# Altium PCB LYT Driver RL.PcbDoc
Units mil, origin at the board's own origin, x right, y up, seen from the top; angles counter-clockwise.
Board outline 2935 x 2834.35 mil, 2 copper layers (Top Layer, Bottom Layer); 34 components, 34 nets, 87 pads, 0 vias.
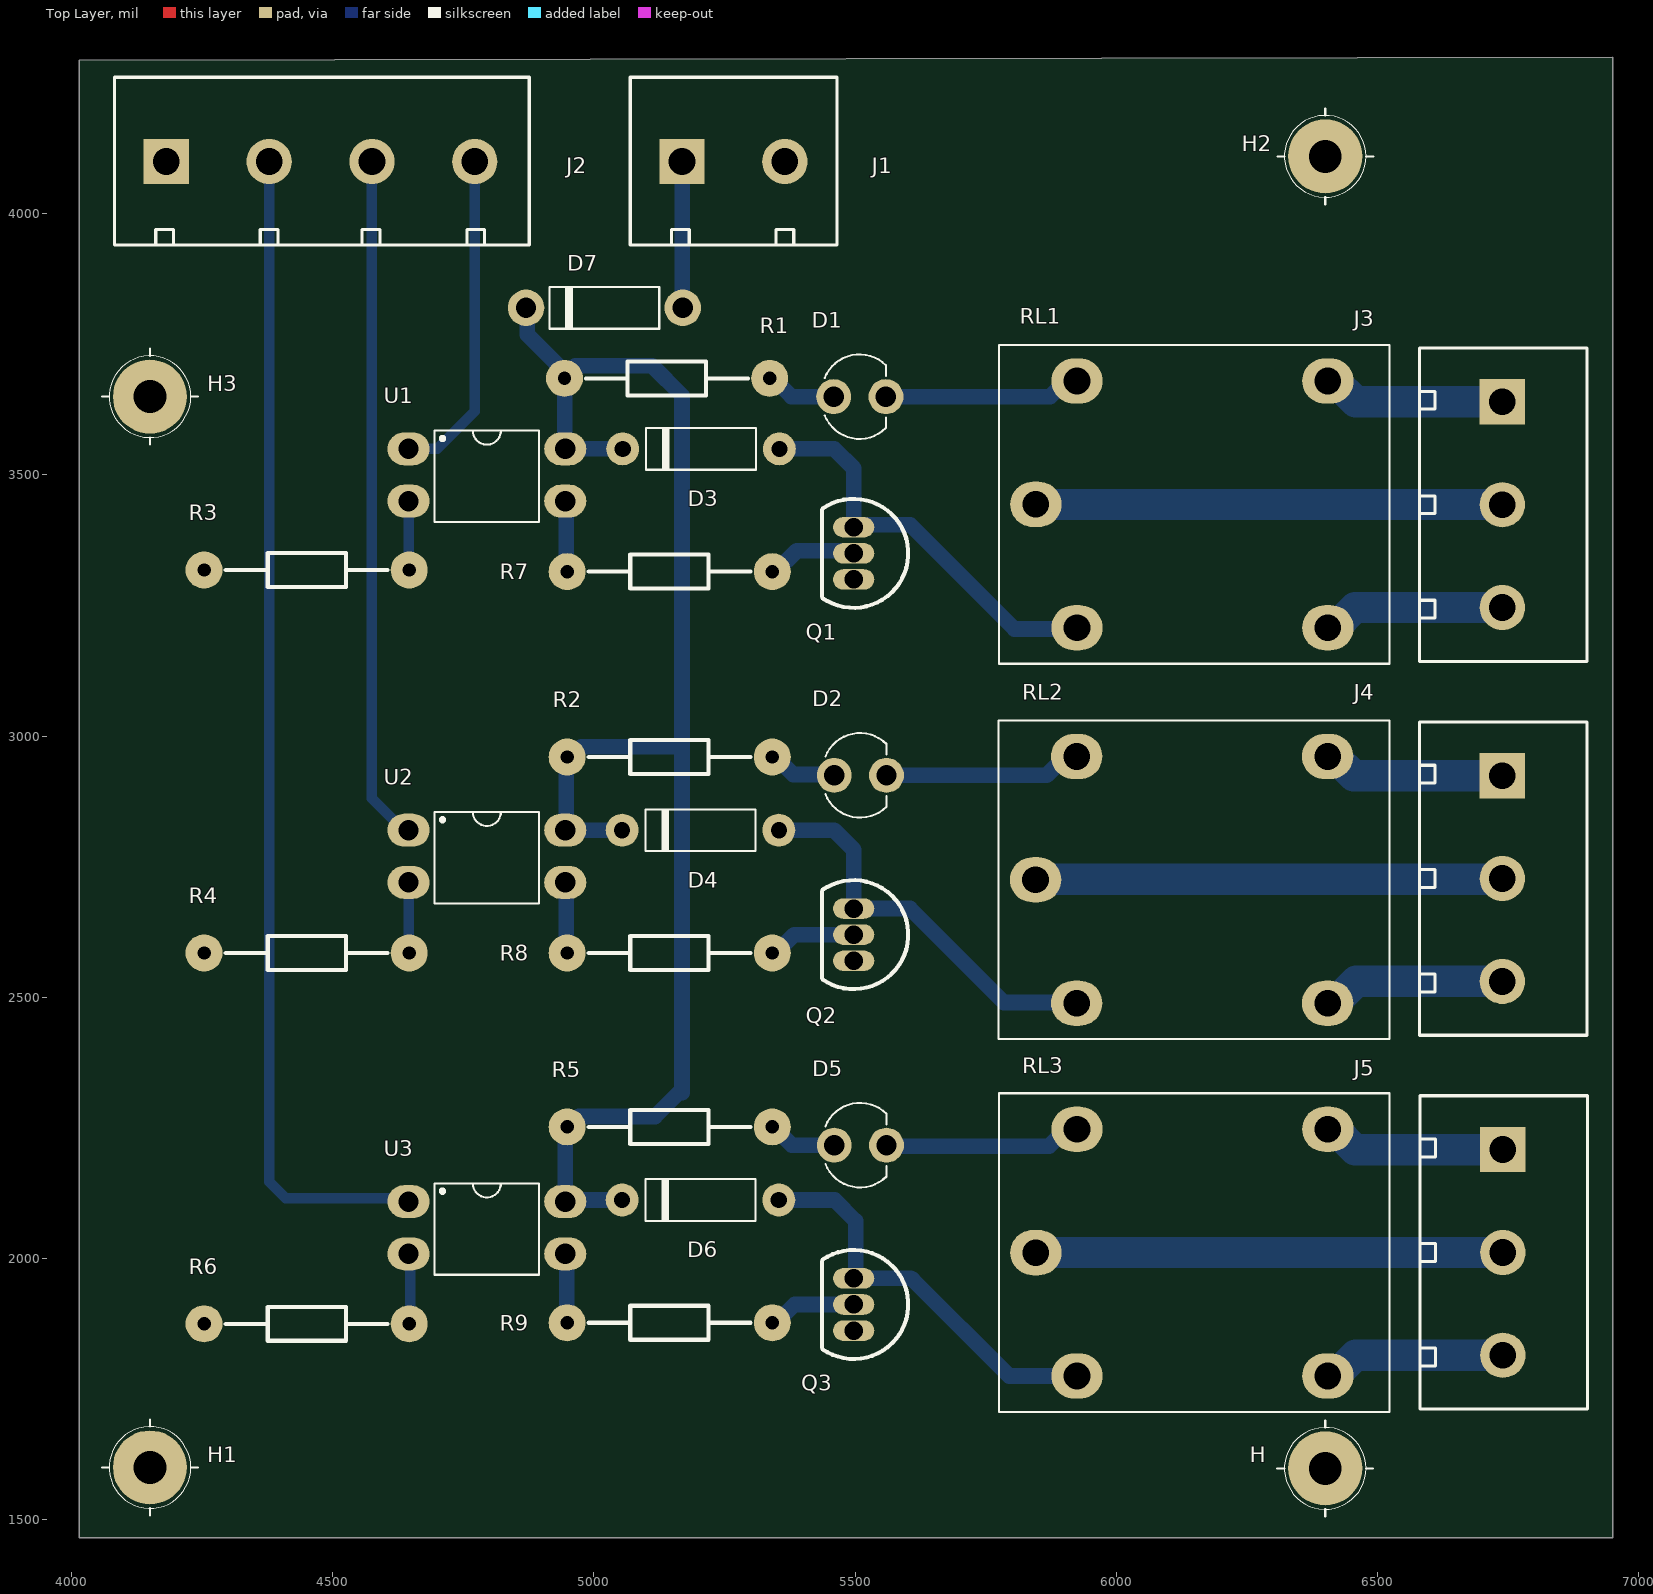
[diagram p0: Top Layer view]
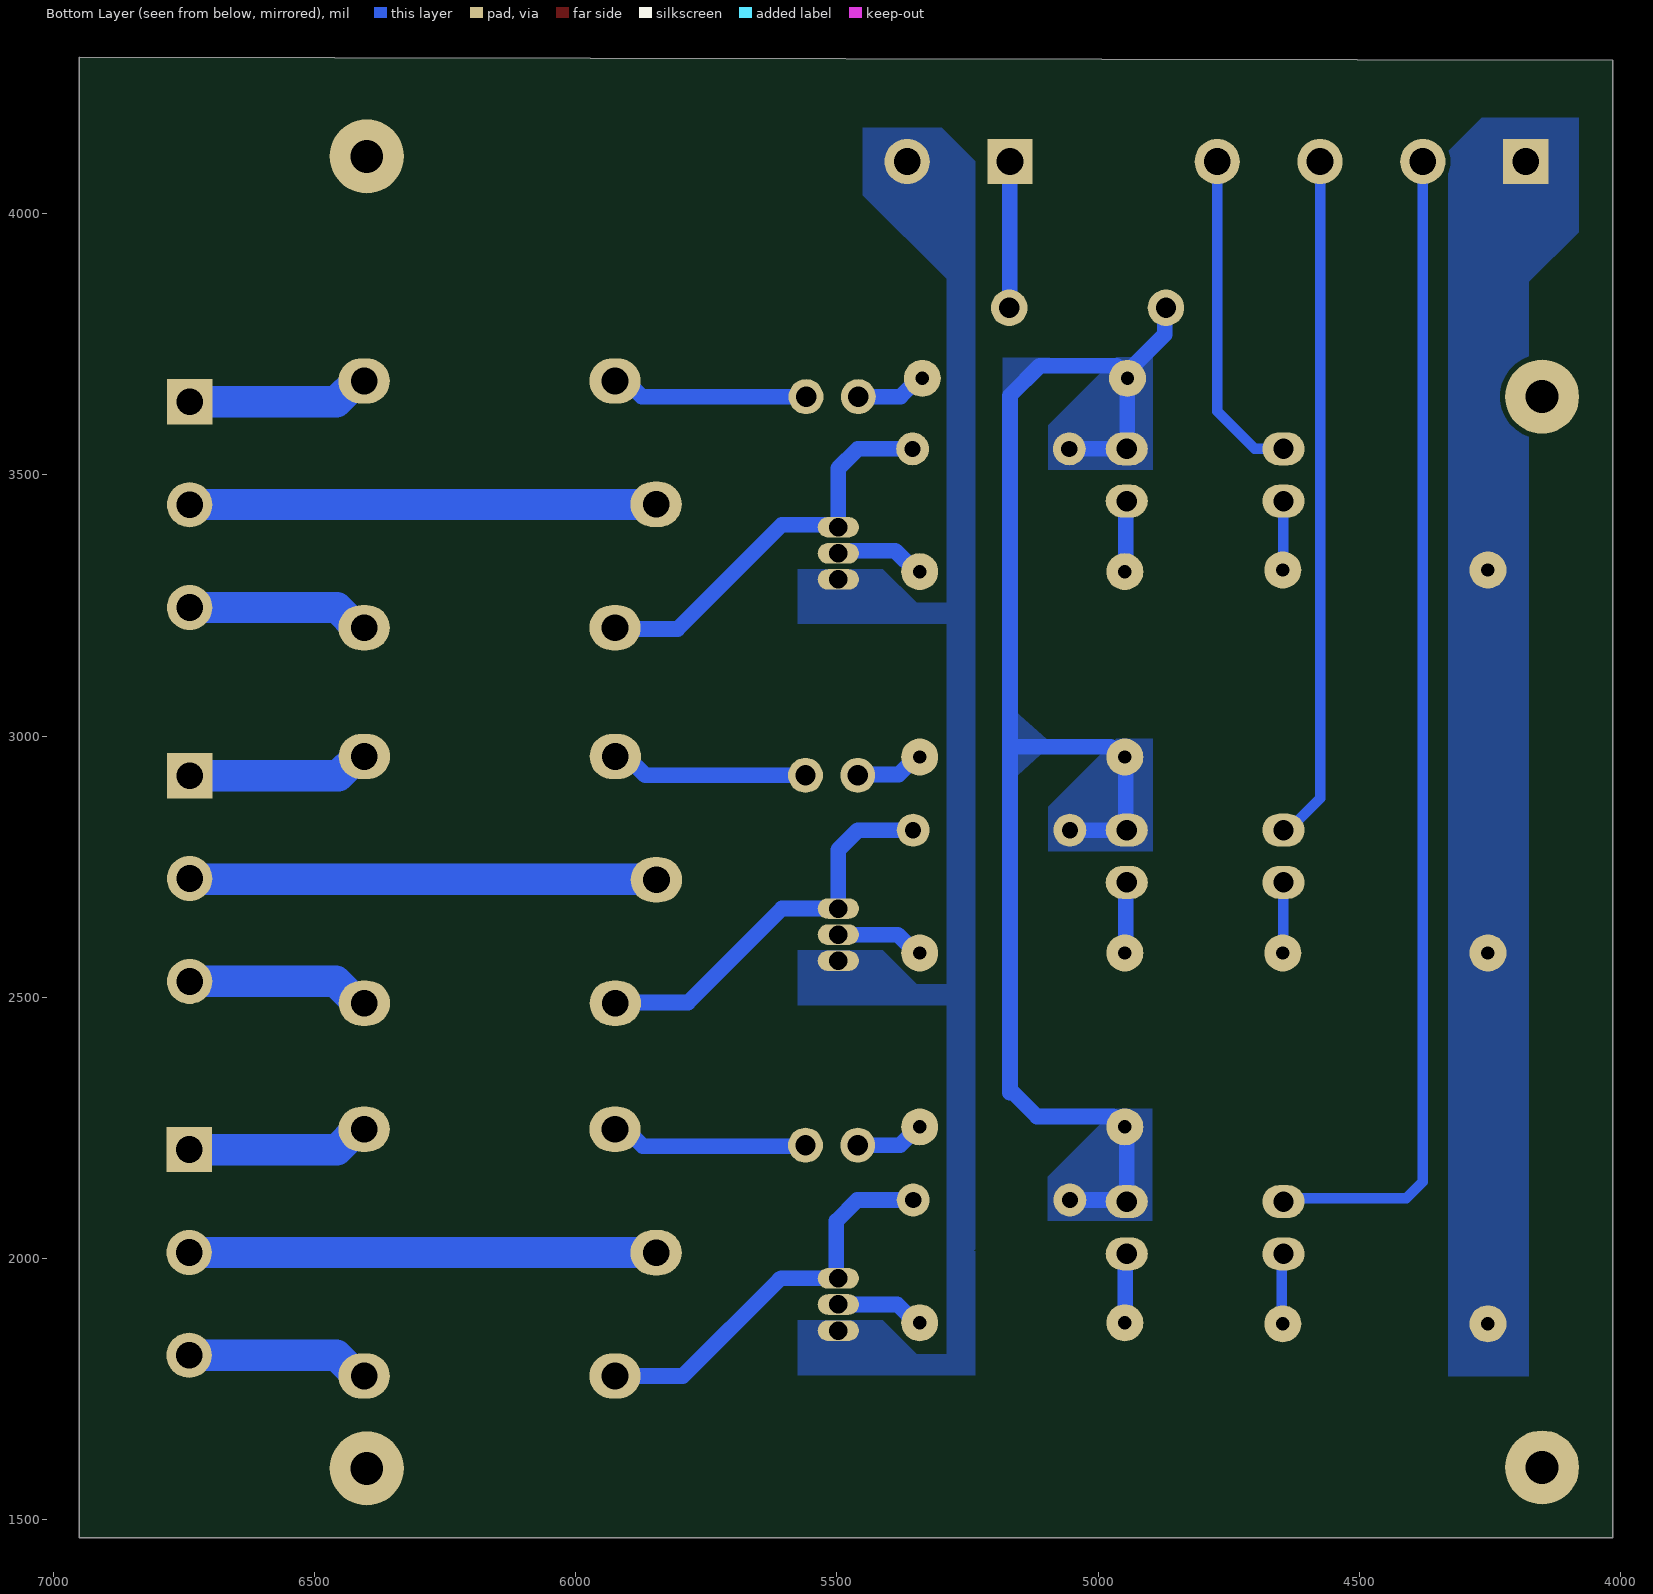
[diagram p1: Bottom Layer view, seen from below]
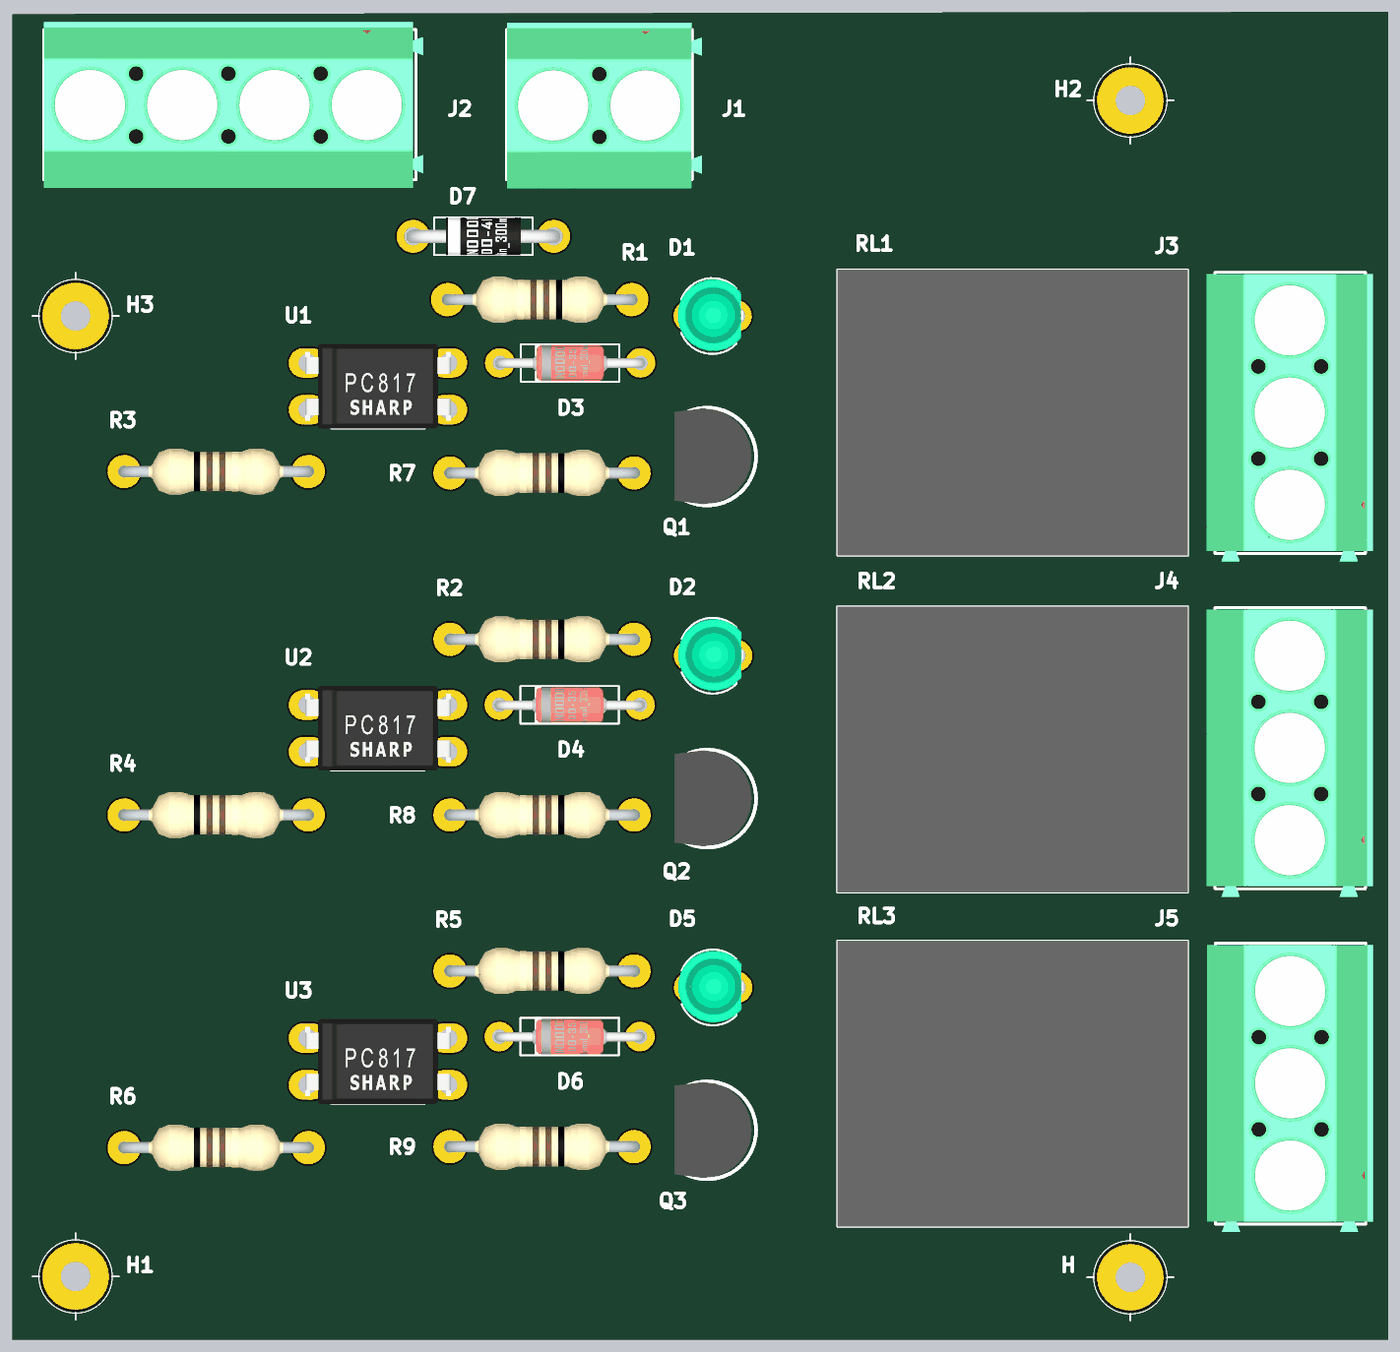
[diagram p2: 3D render of the assembled board from above, using the file's embedded part models]

## Layer stack, top to bottom
Top Solder: solder mask 0.4, Solder Resist, Dk 3.5
Top Layer: signal copper 1.4
Dielectric 1: dielectric 12.6, FR-4, Dk 4.8
Bottom Layer: signal copper 1.4
Bottom Solder: solder mask 0.4, Solder Resist, Dk 3.5

## Board outline
4015,1465 6950,1465 6950,4299.35 4015,4294.35

## Design rules (kind name [scope] priority, off if disabled: settings)
Clearance [All] p1: gap=10 ignorepadtopadclearanceinfootprint=FALSE except(0: Arc-Hole Track-Hole SMDPad-Hole THPad-Hole Via-Hole Fill-Hole Poly-Hole Region-Hole Text-Hole)
PlaneConnect [All] p1: planeconnectstyle=Relief reliefexpansion=20 reliefentries=4 reliefconductorwidth=30 reliefairgap=10
PolygonConnect BGND [InNet('BGND')] p1: thpad.connectstyle=Direct thpad.reliefconductorwidth=30 thpad.reliefentries=4 thpad.polygonreliefangle="90 Angle" thpad.airgapwidth=10 smdpad.connectstyle=Relief smdpad.reliefconductorwidth=25 smdpad.reliefentries=4 smdpad.polygonreliefangle="90 Angle" smdpad.airgapwidth=10 via.connectstyle=Relief via.reliefconductorwidth=10 via.reliefentries=4 via.polygonreliefangle="90 Angle" via.airgapwidth=10
PolygonConnect GND [InNet('GND')] p2: thpad.connectstyle=Direct thpad.reliefconductorwidth=30 thpad.reliefentries=4 thpad.polygonreliefangle="90 Angle" thpad.airgapwidth=10 smdpad.connectstyle=Relief smdpad.reliefconductorwidth=20 smdpad.reliefentries=4 smdpad.polygonreliefangle="90 Angle" smdpad.airgapwidth=10 via.connectstyle=Relief via.reliefconductorwidth=10 via.reliefentries=4 via.polygonreliefangle="90 Angle" via.airgapwidth=10
PolygonConnect [All] p3: connectstyle=Direct reliefconductorwidth=30 reliefentries=4 polygonreliefangle="90 Angle" airgapwidth=10
RoutingVias [All] p1: holewidth=28 width=50 viastyle="Through Hole" minholewidth=28 minwidth=50 maxholewidth=28 maxwidth=50
SolderMaskExpansion [All] p1: expansion=4 istentingtop=FALSE
Width [All] p1: maxlimit=60 minlimit=20 preferedwidth=30 minimp=50.000000 maximp=50.000000 favimp=50.000000
29 further rules are at their usual default settings.

## Components (designator, comment, footprint, x,y, rotation, side; value= is the part's Value field where it differs from the comment)
D1 "Valor" "LED 3MM" 5508.95,3650 r180 top
D2 "Valor" "LED 3MM" 5510,2925 r180 top
D3 "Valor" "1N4148 DO-35" 5205,3550 r0 top
D4 "Valor" "1N4148 DO-35" 5203.95,2820 r0 top
D5 "Valor" "LED 3MM" 5510,2217 r180 top
D6 "Valor" "1N4148 DO-35" 5203.94,2112 r0 top
D7 "Valor" "1N4007 DO-41" 5020,3820 r0 top
H "M3" "PARAFUSO M3" 6400,1598.19 r90 top
H1 "M3" "PARAFUSO M3" 4150,1600 r0 top
H2 "M3" "PARAFUSO M3" 6400,4110 r0 top
H3 "M3" "PARAFUSO M3" 4150,3650 r0 top
J1 "Conector 2v Phoenix" "TERMINAL BLOCK 5MM 2V" 5267,4100 r0 top
J2 "TERMINAL BLOCK 4V" "TERMINAL BLOCK 5MM 4V" 4476.57,4100 r0 top
J3 "Conector 2v Phoenix" "TERMINAL BLOCK 5MM 3V" 6739.03,3443.15 r270 top
J4 "Conector 2v Phoenix" "TERMINAL BLOCK 5MM 3V" 6739.03,2727.39 r270 top
J5 "Conector 2v Phoenix" "TERMINAL BLOCK 5MM 3V" 6740,2011.63 r270 top
Q1 "BC337" "TO 92" 5497.25,3350 r90 top
Q2 "BC337" "TO 92" 5497.26,2620 r90 top
Q3 "BC337" "TO 92" 5497.25,1912 r90 top
R1 "2K2" "RES 1/4 PTH" 5140,3685 r180 top
R2 "2K2" "RES 1/4 PTH" 5145,2960 r180 top
R3 "470R" "RES 1/4 PTH" 4450,3318.06 r0 top
R4 "470R" "RES 1/4 PTH" 4450,2585 r0 top
R5 "2K2" "RES 1/4 PTH" 5145,2252 r180 top
R6 "470R" "RES 1/4 PTH" 4450,1875 r0 top
R7 "1K" "RES 1/4 PTH" 5145,3315 r180 top
R8 "1K" "RES 1/4 PTH" 5145,2585 r180 top
R9 "1K" "RES 1/4 PTH" 5145,1877 r180 top
RL1 "Relé 12v 5p" RELAY 6125.47,3443.78 r0 top
RL2 "Relé 12v 5p" RELAY 6125,2725 r0 top
RL3 "Relé 12v 5p" RELAY 6125.47,2011.22 r0 top
U1 "PC817" "PC817 DIP-4" 4795,3500 r270 top
U2 "PC817" "PC817 DIP-4" 4795,2770 r270 top
U3 "PC817" "PC817 DIP-4" 4794.99,2058.94 r270 top

## Footprints (in the part's own frame and the unit in brackets; to place one, negate y for a bottom-side part, rotate by r counter-clockwise, add the part's x,y. Pads: shape width x height; smd on the part's side, far side on the other; paste and mask are expansions set on the pad)
"1N4007 DO-41" [mil]
  round 70 hole 39: 1(-150,0) 2(150,0)
  silkscreen extent -105,-40 105,40, body extent -164,-40 164,40, height 85
"1N4148 DO-35" [mm]
  round 1.6 hole 0.787: 1(-3.81,0) 2(3.81,0)
  silkscreen extent -2.67,-1.02 2.67,1.02, body extent -4.06,-0.97 4.06,0.94, height 1.97
"LED 3MM" [mm]
  round 1.7 hole 0.991: 1(-1.27,0) 2(1.27,0)
  silkscreen extent -1.27,-2.05 1.71,2.05, body extent -1.66,-1.99 1.91,1.91, height 5.3
"PARAFUSO M3" [mm]
  round 3.6 hole 1.6 unplated: 18(0,0)
  silkscreen extent -2.33,-2.33 2.34,2.34
"PC817 DIP-4" [mm]
  oval 1.6x2.05 hole 0.991: 1(-1.27,-3.81) 2(1.27,-3.81) 3(1.27,3.81) 4(-1.27,3.81)
  silkscreen extent -2.16,-2.54 2.29,2.54, body extent -2.3,-3.94 2.3,3.94, height 4.21
RELAY [mm]
  oval 2.5x2.2 hole 1.3: C1(-5.1,6) C2(-5.1,-6) COM(-7.1,0) NC(7.1,-6) NO(7.1,6)
  silkscreen extent -8.9,-7.75 10.1,7.75, body extent -8.9,-7.75 10.1,7.75, height 15.1
"RES 1/4 PTH" [mm]
  round 1.8 hole 0.65: 1(-4.988,0) 2(4.988,0)
  silkscreen extent -3.94,-0.82 3.94,0.82, body extent -5.31,-1.25 5.29,1.25, height 2.75
"TERMINAL BLOCK 5MM 2V" [mm]
  rect 2.2x2.2 hole 1.3: 1(-2.5,0)
  round 2.2 hole 1.3: 2(2.5,0)
  silkscreen extent -5.02,-4.05 5.04,4.1, body extent -4.99,-4.52 5.58,4.48, height 13.61
"TERMINAL BLOCK 5MM 3V" [mm]
  rect 2.2x2.2 hole 1.3: 1(-5,0)
  round 2.2 hole 1.3: 2(0,0) 3(5,0)
  silkscreen extent -7.62,-4.02 7.62,4.13, body extent -7.52,-4.48 8.05,4.52, height 13.61
"TERMINAL BLOCK 5MM 4V" [mm]
  rect 2.2x2.2 hole 1.3: 1(-7.5,0)
  round 2.2 hole 1.3: 2(-2.5,0) 3(2.5,0) 4(7.5,0)
  silkscreen extent -10.02,-4.05 10.15,4.1, body extent -10.02,-4.5 10.55,4.5, height 13.61
"TO 92" [mm]
  oval 1x2 hole 0.9: 1(1.27,0) 2(0,0) 3(-1.27,0)
  silkscreen extent -2.65,-2.65 2.65,1.55, body extent -2.59,-2.41 2.62,1.78, height 13.95

## Part data
D1 D2 D5: library part LED, "Typical RED, GREEN, YELLOW, AMBER GaAs LED", LatestRevisionDate=17-Jul-2002, LatestRevisionNote="Re-released for DXP Platform.", PackageDescription="SM LED; 2 Flat Leads", PackageReference=3.2X1.6X1.1, PackageVersion=Feb-2002, Published=8-Jun-2000, Publisher="Altium Limited"
D3 D4 D6: library part "DIODO 1N4148", "Diodo rapido", Code_JEDEC=DO-204-AH, ComponentLink1Description="Manufacturer Link", ComponentLink1URL=http://www.fairchildsemi.com/, ComponentLink2Description=Datasheet, ComponentLink2URL=http://www.fairchildsemi.com/ds/1N%2F1N4148.pdf, DatasheetVersion=1997, LatestRevisionDate=17-Jul-2002, LatestRevisionNote="Re-released for DXP Platform.", PackageDescription="Diode, Axial; Body 3.8 x 1.9 mm (LxDia. max), Lead Dia. 0.53 mm (max)", PackageReference=DO-35, Published=8-Jun-2000, Publisher="Altium Limited"
D7: library part "DIODO 1N4007", "Diodo rapido", Code_JEDEC=DO-204-AH, ComponentLink1Description="Manufacturer Link", ComponentLink1URL=http://www.fairchildsemi.com/, ComponentLink2Description=Datasheet, ComponentLink2URL=http://www.fairchildsemi.com/ds/1N%2F1N4148.pdf, DatasheetVersion=1997, LatestRevisionDate=17-Jul-2002, LatestRevisionNote="Re-released for DXP Platform.", PackageDescription="Diode, Axial; Body 3.8 x 1.9 mm (LxDia. max), Lead Dia. 0.53 mm (max)", PackageReference=DO-35, Published=8-Jun-2000, Publisher="Altium Limited"
H H1 H2 H3: library part "Furo M3"
J1: library part "TERMINAL BLOCK 2V", "Block, Terminal; 6 A; 63 V; 5 mm; 26 to 20 AWG; 2; Screw; Soldering; 1.5 kV", Color=Green, Current=6A, Flammability Rating="UL94 V-0", Manufacturer="Phoenix Contact", Manufacturer Part Number=1725656, Max Supply Voltage=63V, Package Quantity=50, Supplier Part Number 1=651-1725656, Voltage=125V, Approvals=UL,CSA,cULus,EAC, Category="Terminal Blocks", ComponentLink1Description=https://datasheet.ciiva.com/16071/1725656-16071846.pdf?src-supplier=Onlinecomponents.com, ComponentLink1URL=https://datasheet.ciiva.com/16071/1725656-16071846.pdf?src-supplier=Onlinecomponents.com, ComponentLink2Description=https://datasheet.ciiva.com/15169/getdatasheetpartid-199323-15169849.pdf?src-supplier=Verical, ComponentLink2URL=https://datasheet.ciiva.com/15169/getdatasheetpartid-199323-15169849.pdf?src-supplier=Verical, ComponentLink3Description=https://datasheet.ciiva.com/823/1725656-823793.pdf?src-supplier=Digi-Key, ComponentLink3URL=https://datasheet.ciiva.com/823/1725656-823793.pdf?src-supplier=Digi-Key, ComponentLink4Description=https://datasheet.ciiva.com/1120/319957-1120510.pdf?src-supplier=Farnell, ComponentLink4URL=https://datasheet.ciiva.com/1120/319957-1120510.pdf?src-supplier=Farnell, ComponentLink5Description=https://datasheet.ciiva.com/26340/788052-da-01-en-100ntklemme-1725656-250-st-26340907.pdf?src-supplier=Conrad, ComponentLink5URL=https://datasheet.ciiva.com/26340/788052-da-01-en-100ntklemme-1725656-250-st-26340907.pdf?src-supplier=Conrad, Connector Type="Screw,PCB,Terminal Block", Contact Material=Tin, Current Rating=6A, Depth=6.2mm, Height=6.2mm, Housing Color=Green, Housing Material=Polyamide, Insulation Material=Nylon, Lead Free="Lead Free", Length=5.54mm, Max Current Rating=6A, Mount="Through Hole", Number of Circuits=2, Number of Contacts=2, Number of Levels=1, Number of Pins=2, Number of Poles=2, Number of Positions=2, Number of Positions Per Level=2, Number of Rows=1, Orientation=Straight, Packaging=Bulk, Pitch=2.54mm, Pricing 1="1=1,94000, 10=1,76000, 50=1,69000, 100=1,64000, 1000=1,27000, 10000=1,17000 (USD)", Radiation Hardening=No, Reach SVHC Compliant=Yes, RoHS=Yes, RoHS Compliant=Yes, Series=MPT, Stock 1=29866, Stripping Length=4.5mm, Termination=Solder, Voltage Rating=125V, Weight=0.022575oz, Width=12mm, Wire Gauge (Max)=26AWG, Wire Gauge (Min)=20AWG, Wire/Cable Gauge=26AWG
J2: "Block, Terminal; 6 A; 63 V; 5 mm; 26 to 20 AWG; 4 Screw; Soldering; 1.5 kV"
J3 J4 J5: library part "TERMINAL BLOCK 3V", "Block, Terminal; 6 A; 63 V; 5 mm; 26 to 20 AWG; 3; Screw; Soldering; 1.5 kV", Color=Green, Current=6A, Flammability Rating="UL94 V-0", Manufacturer="Phoenix Contact", Manufacturer Part Number=1725656, Max Supply Voltage=63V, Package Quantity=50, Supplier Part Number 1=651-1725656, Voltage=125V, Approvals=UL,CSA,cULus,EAC, Category="Terminal Blocks", ComponentLink1Description=https://datasheet.ciiva.com/16071/1725656-16071846.pdf?src-supplier=Onlinecomponents.com, ComponentLink1URL=https://datasheet.ciiva.com/16071/1725656-16071846.pdf?src-supplier=Onlinecomponents.com, ComponentLink2Description=https://datasheet.ciiva.com/15169/getdatasheetpartid-199323-15169849.pdf?src-supplier=Verical, ComponentLink2URL=https://datasheet.ciiva.com/15169/getdatasheetpartid-199323-15169849.pdf?src-supplier=Verical, ComponentLink3Description=https://datasheet.ciiva.com/823/1725656-823793.pdf?src-supplier=Digi-Key, ComponentLink3URL=https://datasheet.ciiva.com/823/1725656-823793.pdf?src-supplier=Digi-Key, ComponentLink4Description=https://datasheet.ciiva.com/1120/319957-1120510.pdf?src-supplier=Farnell, ComponentLink4URL=https://datasheet.ciiva.com/1120/319957-1120510.pdf?src-supplier=Farnell, ComponentLink5Description=https://datasheet.ciiva.com/26340/788052-da-01-en-100ntklemme-1725656-250-st-26340907.pdf?src-supplier=Conrad, ComponentLink5URL=https://datasheet.ciiva.com/26340/788052-da-01-en-100ntklemme-1725656-250-st-26340907.pdf?src-supplier=Conrad, Connector Type="Screw,PCB,Terminal Block", Contact Material=Tin, Current Rating=6A, Depth=6.2mm, Height=6.2mm, Housing Color=Green, Housing Material=Polyamide, Insulation Material=Nylon, Lead Free="Lead Free", Length=5.54mm, Max Current Rating=6A, Mount="Through Hole", Number of Circuits=2, Number of Contacts=2, Number of Levels=1, Number of Pins=2, Number of Poles=2, Number of Positions=2, Number of Positions Per Level=2, Number of Rows=1, Orientation=Straight, Packaging=Bulk, Pitch=2.54mm, Pricing 1="1=1,94000, 10=1,76000, 50=1,69000, 100=1,64000, 1000=1,27000, 10000=1,17000 (USD)", Radiation Hardening=No, Reach SVHC Compliant=Yes, RoHS=Yes, RoHS Compliant=Yes, Series=MPT, Stock 1=29866, Stripping Length=4.5mm, Termination=Solder, Voltage Rating=125V, Weight=0.022575oz, Width=12mm, Wire Gauge (Max)=26AWG, Wire Gauge (Min)=20AWG, Wire/Cable Gauge=26AWG
R1 R2 R3 R4 R5 R6 R7 R8 R9: library part "RESISTOR 1/4W", "Resistor", LatestRevisionDate=17-Jul-2002, LatestRevisionNote="Re-released for DXP Platform.", PackageDescription="Axial Device, Thru-Hole; 2 Leads; 0.4 in Pin Spacing", PackageReference=AXIAL-0.4, Published=8-Jun-2000, Publisher="Altium Limited"

## Nets (pads, with @x,y where several pads share a name; then routed paths per layer and width w, separated by ;. In a path a pad name is that pad's centre, name@x,y a point inside that pad or via, vN(x,y) a via of type N, cw(c..) or ccw(c..) an arc to the next point about the centre after c; other vN are vias at no path point)
BGND: J2.1 R3.1 R4.1 R6.1
COM: J3.2 RL1.COM | length 893.3
  Bottom Layer w60: RL1.COM 5846.26,3443.46 6738.71,3443.46 J3.2
COM1: J5.2 RL3.COM | length 894.2
  Bottom Layer w60: RL3.COM 5846.15,2011.43 6739.79,2011.43 J5.2
COM2: J4.2 RL2.COM | length 894.5
  Bottom Layer w60: RL2.COM 5846.67,2726.2 6737.83,2726.2 J4.2
GND: J1.2 Q1.3 Q2.3 Q3.3
NC: J3.3 RL1.NC | length 350.1
  Bottom Layer w60: RL1.NC 6418.11,3207.56 6456.85,3246.3 J3.3
NC1: J5.3 RL3.NC | length 351.5
  Bottom Layer w60: RL3.NC 6418.11,1775 6457.89,1814.78 J5.3
NC2: J4.3 RL2.NC | length 351.8
  Bottom Layer w60: RL2.NC 6417.63,2488.78 6459.4,2530.54 J4.3
NetD1_1: D1.1 RL1.C1 | length 378.2
  Bottom Layer w30: D1.1 5873.46,3650 5903.46,3680 RL1.C1
NetD1_2: D1.2 R1.1 | length 137.1
  Bottom Layer w30: R1.1 5343.16,3685 5378.16,3650 D1.2
NetD2_1: D2.1 RL2.C1 | length 379.2
  Bottom Layer w30: D2.1 5866.77,2925 5902.99,2961.22 RL2.C1
NetD2_2: D2.2 R2.1 | length 133.1
  Bottom Layer w30: R2.1 5348.16,2960 5381.54,2926.62 5458.38,2926.62 D2.2
NetD3_2: D3.2 Q1.1 RL1.C2 | length 776.8
  Bottom Layer w30: D3.2 5460,3550 5497.26,3512.74 5497.26,3405 5605,3405 5805,3205 5922.13,3205 RL1.C2
NetD4_2: D4.2 Q2.1 RL2.C2 | length 773.5
  Bottom Layer w30: D4.2 5460,2820 5497.26,2782.74 Q2.1 5605,2670 5785,2490 5922.99,2490 RL2.C2
NetD5_1: D5.1 RL3.C1 | length 374.2
  Bottom Layer w30: D5.1@5563.95,2215 5871.02,2215 5903.46,2247.44 RL3.C1
NetD5_2: D5.2 R5.1 | length 137.1
  Bottom Layer w30: R5.1@5337.31,2252 5344.1,2252 5379.1,2217 D5.2@5459.89,2217
NetD6_2: D6.2 Q3.1 RL3.C2 | length 767.9
  Bottom Layer w30: D6.2@5355.95,2112 5460.95,2112 5500.95,2072 5500.95,1962 5605.95,1962 ; 5610,1960 5795,1775 RL3.C2
NetD7_2: D7.2 J1.1 | length 280.6
  Bottom Layer w30: J1.1 5169.29,4099.29 5169.29,3820.71 D7.2
NetQ1_2: Q1.2 R7.1 | length 172.5
  Bottom Layer w30: R7.1 5348.16,3315 5388.16,3355 Q1.2@5497.26,3355
NetQ2_2: Q2.2 R8.1 | length 170.4
  Bottom Layer w30: R8.1 5348.16,2585 5383.16,2620 Q2.2
NetQ3_2: Q3.2 R9.1 | length 173.1
  Bottom Layer w30: R9.1@5342.31,1877 5349.1,1877 5384.1,1912 Q3.2@5500.95,1912
NetR3_2: R3.2 U1.2 | length 132.5
  Bottom Layer w20: U1.2 4645.68,3449.32 4645.68,3318.74 R3.2
NetR4_2: R4.2 U2.2 | length 135.6
  Bottom Layer w20: U2.2 4645.68,2719.32 4645.68,2585.68 R4.2
NetR6_2: R6.2 U3.2 | length 136.5
  Bottom Layer w20: R6.2 4648.18,1876.82 4648.18,2008.18 U3.2@4650,2010
NetR7_2: R7.2 U1.3 | length 136.5
  Bottom Layer w30: U1.3 4946.82,3448.18 4946.82,3316.82 R7.2
NetR8_2: R8.2 U2.3 | length 136.5
  Bottom Layer w30: U2.3 4946.82,2718.18 4946.82,2586.82 R8.2
NetR9_2: R9.2 U3.3 | length 136.5
  Bottom Layer w30: U3.3@4945.95,2012 4947.77,2010.18 4947.77,1878.82 R9.2@4949.59,1877
NO: J3.1 RL1.NO | length 350.6
  Bottom Layer w60: RL1.NO 6418.11,3680 6458.11,3640 J3.1
NO1: J5.1 RL3.NO | length 351.1
  Bottom Layer w60: RL3.NO 6418.11,2247.44 6457.06,2208.48 J5.1
NO2: J4.1 RL2.NO | length 349.8
  Bottom Layer w60: RL2.NO 6417.63,2961.22 6454.61,2924.24 J4.1
RL1: J2.4 U1.1 | length 634.8
  Bottom Layer w20: U1.1 4645.41,3550.41 4700.41,3550.41 4771.85,3621.85 J2.4
RL2: J2.3 U2.1 | length 1314.2
  Bottom Layer w20: J2.3 4575,2881.14 4636.14,2820 U2.1
RL3: J2.2 U3.1 | length 2240.3
  Bottom Layer w20: J2.2 4378.15,2146.85 4410,2115 4645,2115 U3.1@4650,2110
VCC: D3.1 D4.1 D6.1 D7.1 R1.2 R2.2 R5.2 U1.4 U2.4 U3.4 | length 2983.1
  Bottom Layer w30: D7.1 4872.07,3817.93 4872.07,3768.93 4935.82,3705.18 4935.82,3692.82 R1.2 ; D4.1 U2.4 4946.82,2821.82 4946.82,2958.18 R2.2 4955.44,2960 4975.44,2980 5168.57,2980 5168.57,2317.57 ; D3.1 U1.4 4944.32,3550.68 4944.32,3684.32 R1.2 ; D6.1@5055.95,2112 4945.95,2112 4945.27,2112.68 4945.27,2251.32 4944.59,2252 4951.39,2252 4971.39,2272 5116.95,2272 5164.52,2319.57 ; 5168.44,2980 5168.44,3652 5111.44,3709 4964,3709 4943.64,3688.64 R1.2
pads on no net: H1.18 H2.18 H3.18 H.18

## Polygon pours and split planes (outlines as drawn)
BGND on Bottom Layer "BGND_L02_P017" (solid, pour order 17): 4330,1775 4175,1775 4175,3870 4080,3965 4080,4184 4265,4184 4330,4119
GND on Bottom Layer "GND_L02_P016" (solid, pour order 16): 5235.25,2014 5235.26,2722 5235.25,3452 5235,3452.25 5235,4101 5299,4165 5450,4165 5450,4036 5289.25,3875.25 5289.25,2722.01 5289.25,2014
GND on Bottom Layer "GND_L02_P015" (solid, pour order 15): 5235.25,3452 5235.25,3215 5575.25,3215 5575.25,3320 5412.25,3320 5347.25,3255 5289.25,3255 5289.25,3452
GND on Bottom Layer "GND_L02_P014" (solid, pour order 14): 5235.25,2014 5235.25,1777 5575.25,1777 5575.25,1882 5412.25,1882 5347.25,1817 5289.25,1817 5289.25,2014
GND on Bottom Layer "GND_L02_P013" (solid, pour order 13): 5235.26,2722 5235.26,2485 5575.26,2485 5575.26,2590 5412.26,2590 5347.26,2525 5289.26,2525 5289.26,2722
VCC on Bottom Layer "VCC_L02_P010" (solid, pour order 10): 5179,2902 5179,3066 5088,2985
VCC on Bottom Layer "VCC_L02_P003" (solid, pour order 3): 5182.65,3621.61 5182.65,3724.08 5085.65,3724.08
VCC on Bottom Layer "VCC_L02_P002" (solid, pour order 2): 4895.95,2287 4895.95,2072 5095.95,2072 5095.95,2157 4965.95,2287
VCC on Bottom Layer "VCC_L02_P001" (solid, pour order 1): 4895,2995 4895,2780 5095,2780 5095,2865 4965,2995
VCC on Bottom Layer "VCC_L02_P000" (solid, pour order 0): 4895,3725 4895,3510 5095,3510 5095,3595 4965,3725

## Silkscreen, mask and mechanical layers (free items; w line width, h text height)
Board Outline:
  lines w10: 4015,1465 5725,1465 6950,1465 6950,4299.35 4015,4294.35 4015,1465